# Altium PCB 5Vto24V.PcbDoc
Units mm, origin at the board's own origin, x right, y up, seen from the top; angles counter-clockwise.
Board outline 89.1 x 92.94 mm, 2 copper layers (Top Layer, Bottom Layer), stack 0.74 mm thick; 8 components, 13 nets, 145 pads, 8 vias.
Unrouted connection lines stored in the file: 13.
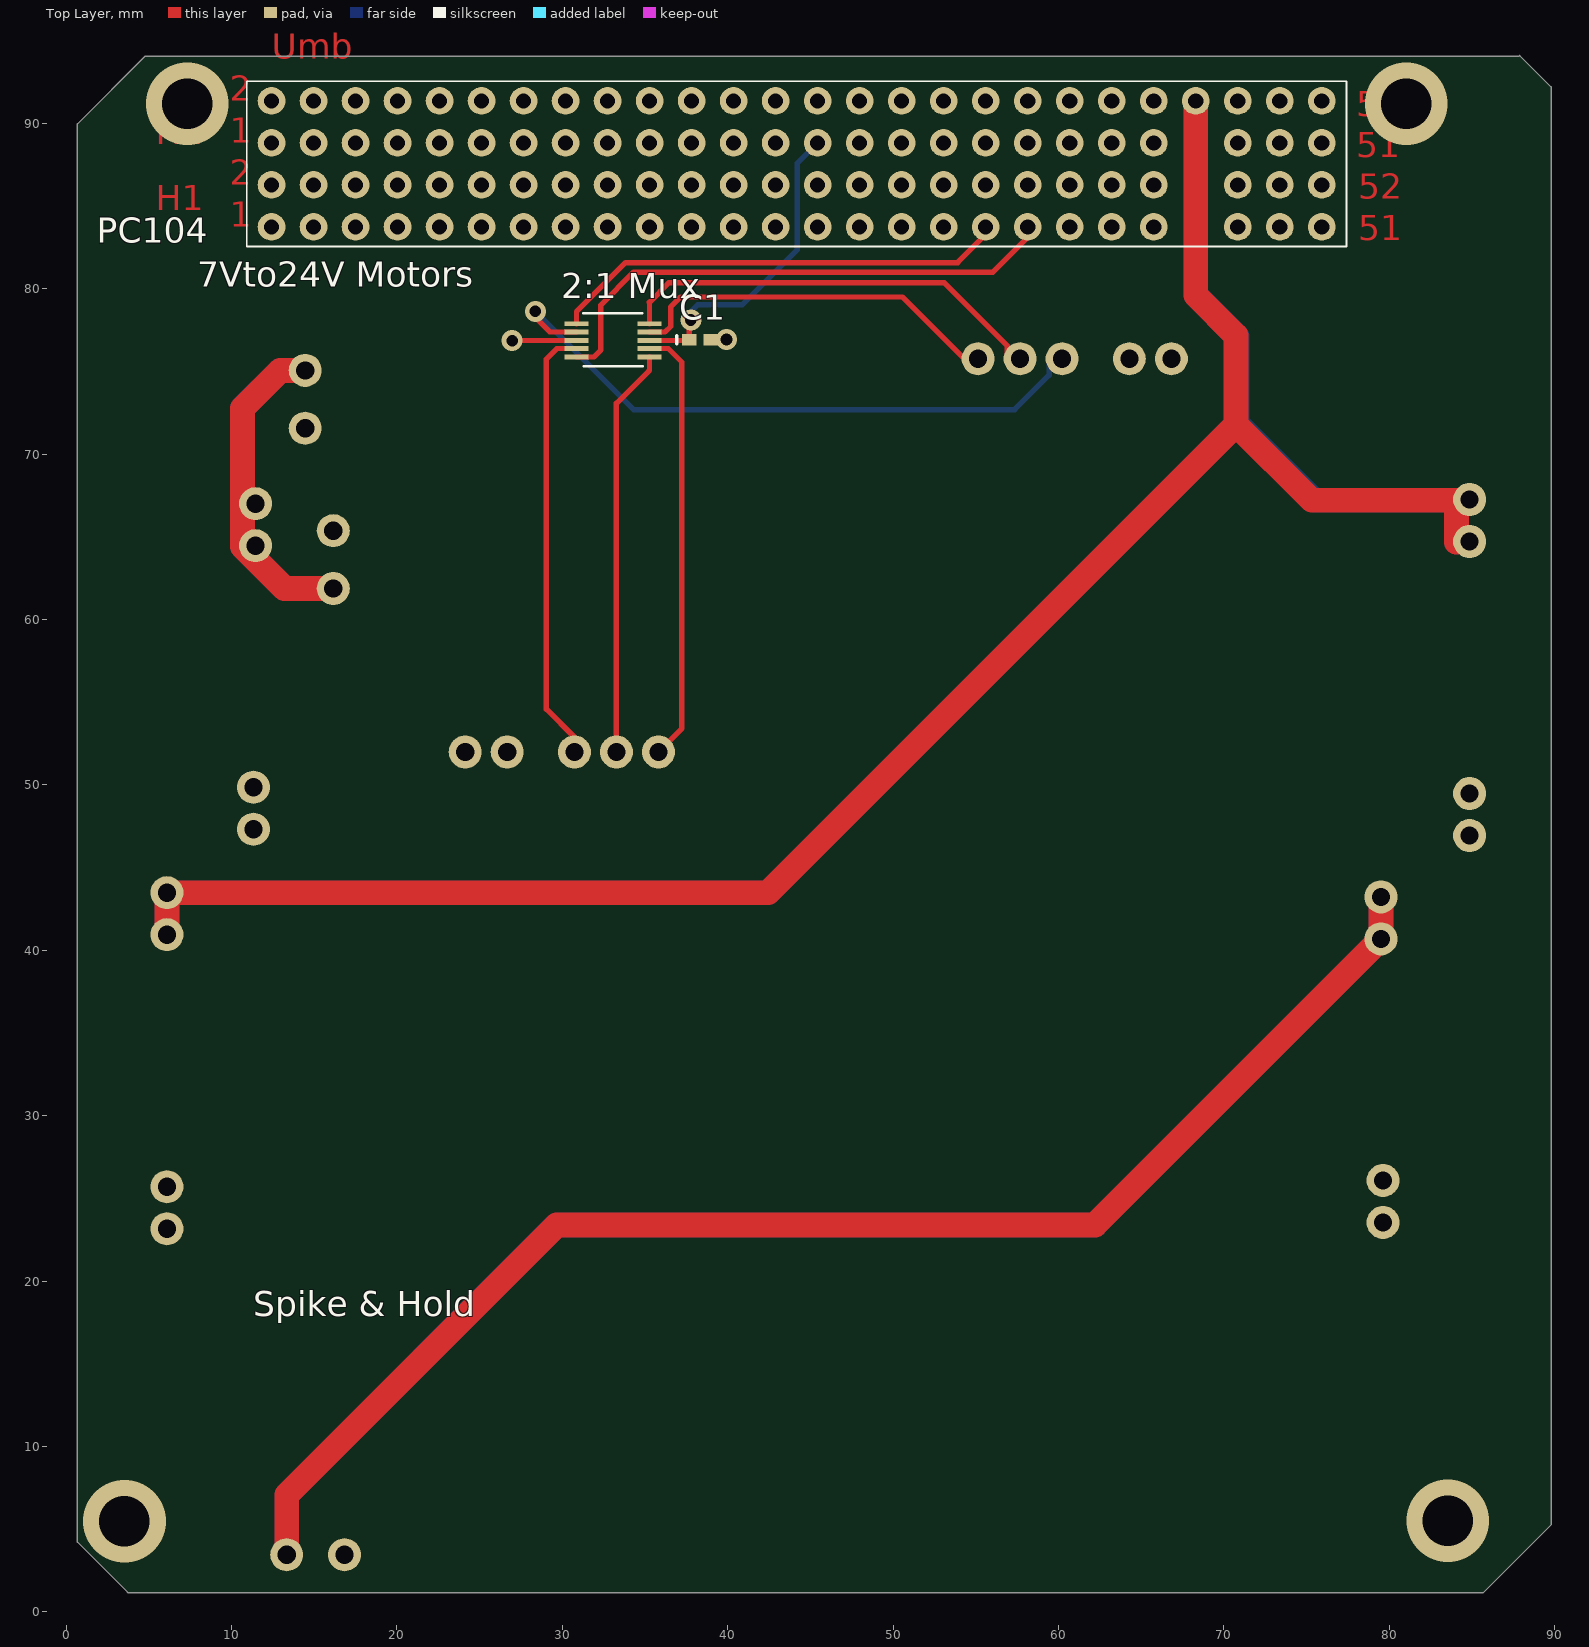
[diagram p0: Top Layer view]
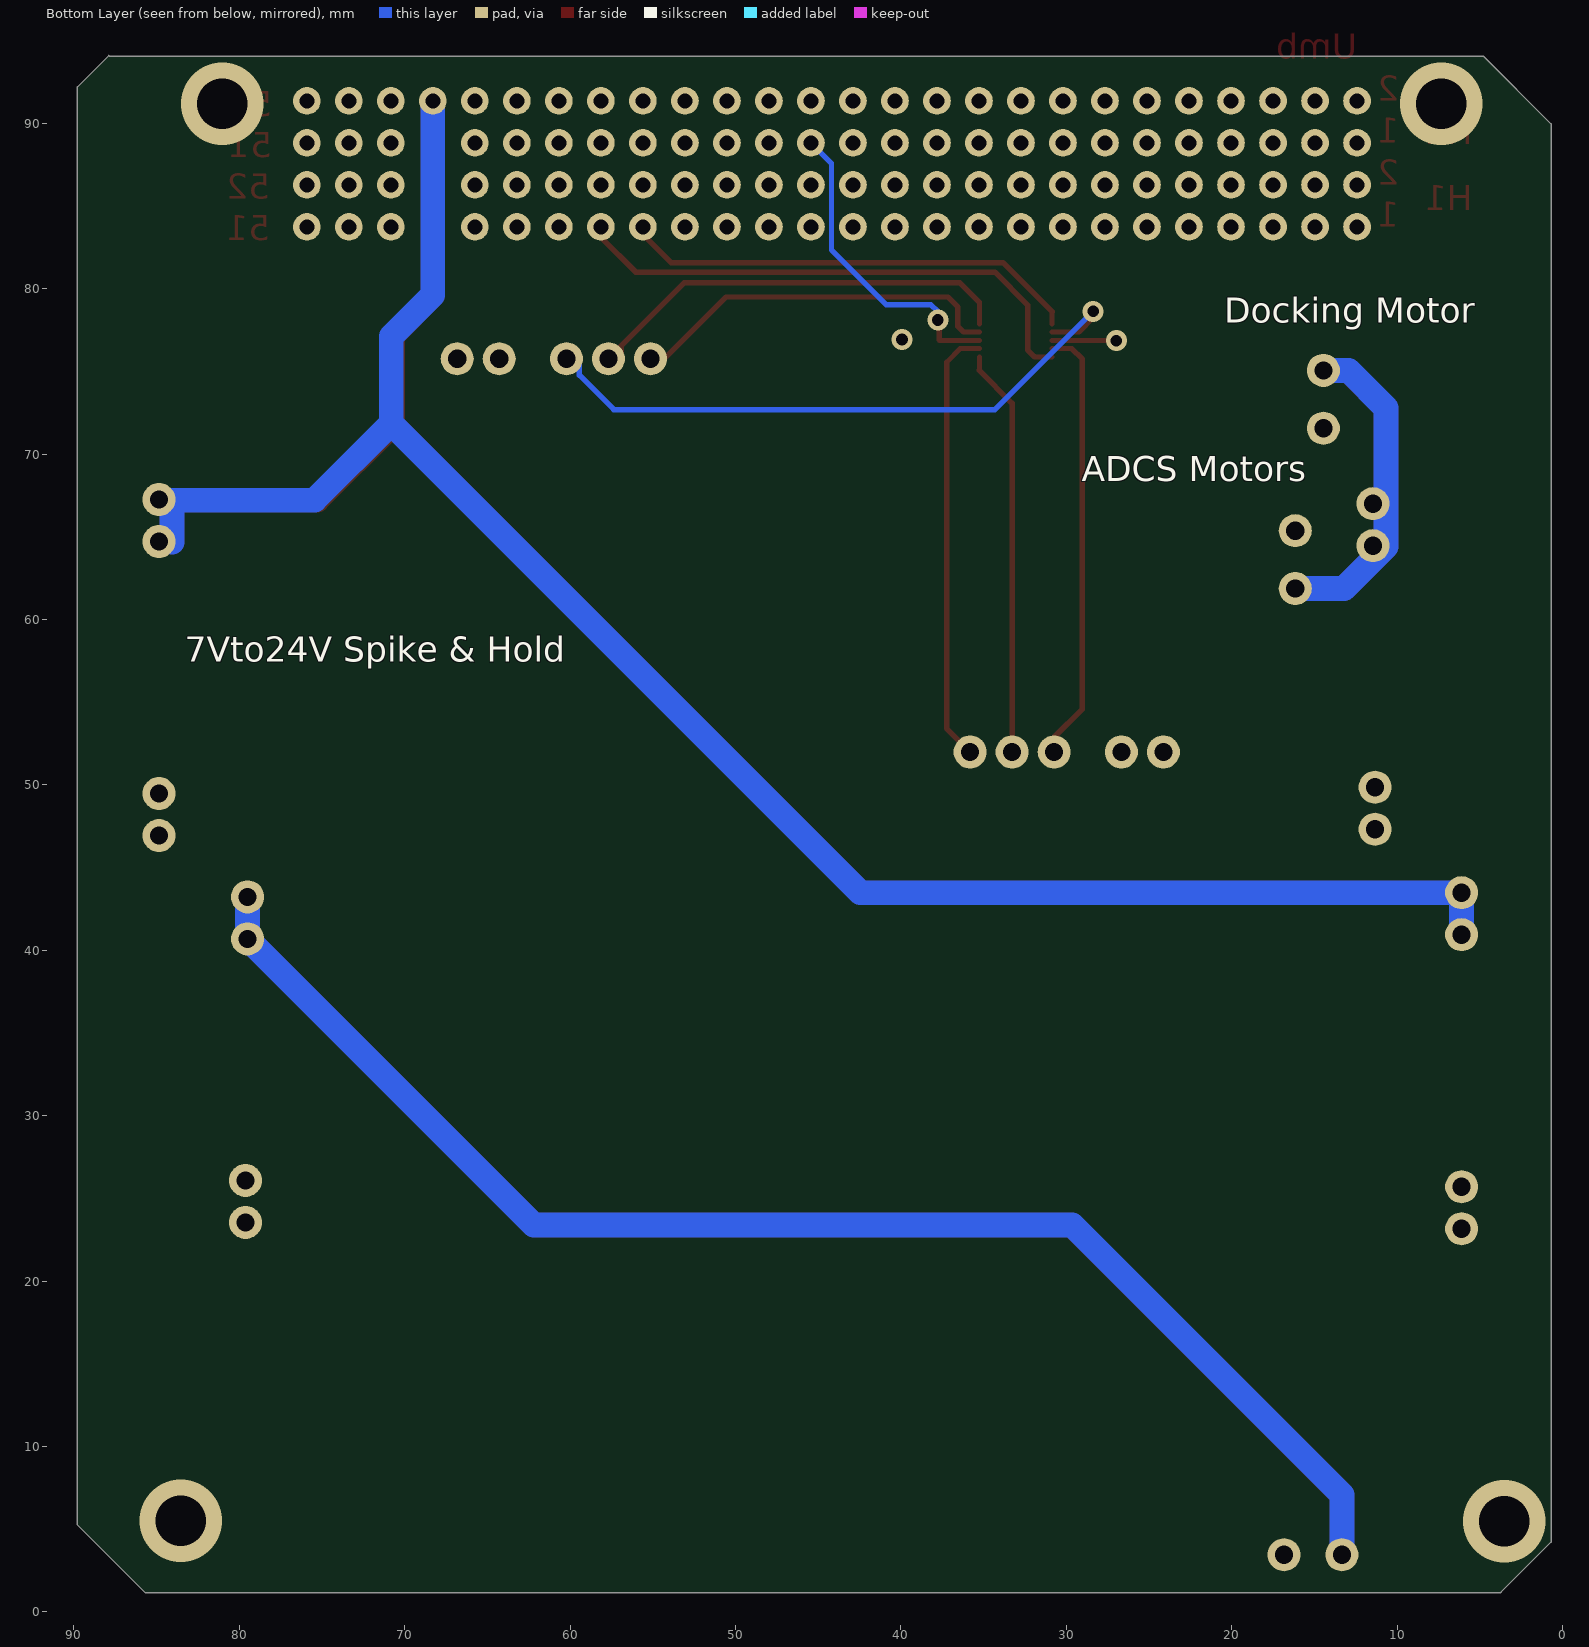
[diagram p1: Bottom Layer view, seen from below]

## Layer stack, top to bottom
Top Solder: solder mask 0.0102, Solder Resist, Dk 3.5
Top Layer: signal copper 0.37
Bottom Layer: signal copper 0.37
Bottom Solder: solder mask 0.0102, Solder Resist, Dk 3.5

## Board outline
4.775,94.056 0.686,89.967 0.686,4.216 3.708,1.194 3.734,1.168 84.506,1.168 85.7,1.168 89.789,5.258 89.789,91.821 89.789,92.202 87.884,94.107 87.833,94.056 4.801,94.056

## Design rules (kind name [scope] priority, off if disabled: settings)
Clearance [All] p1: gap=0.254 ignorepadtopadclearanceinfootprint=FALSE except(0: Arc-Hole Track-Hole SMDPad-Hole THPad-Hole Via-Hole Fill-Hole Poly-Hole Region-Hole Text-Hole; 0.127: Track-Track Track-SMDPad Track-THPad SMDPad-SMDPad SMDPad-THPad THPad-THPad)
HoleSize [All] p1: absolutevalues=TRUE maxlimit=3.048 minlimit=0.025 maxpercent=80.000 minpercent=20.000
MinimumSolderMaskSliver [All] p1: minsoldermaskwidth=0.127
PlaneConnect [All] p1: planeconnectstyle=Direct reliefexpansion=0.508 reliefentries=4 reliefconductorwidth=0.254 reliefairgap=0.254
PolygonConnect [All] p1: connectstyle=Direct reliefconductorwidth=0.254 reliefentries=4 polygonreliefangle="90 Angle" airgapwidth=0.254
RoomDefinition TopV4 [InComponentClass('TopV4')] p1: confinementstyle=ConfineIn formatcopy=TRUE lockcomponents=FALSE outline -100,-100 -49.2,-100 -49.2,-74.6 -100,-74.6
RoutingVias [All] p1: holewidth=0.711 width=1.27 viastyle="Through Hole" minholewidth=0.711 minwidth=1.27 maxholewidth=0.711 maxwidth=1.27
SolderMaskExpansion [All] p1: expansion=0.102
Width [All] p1: maxlimit=0.99 minlimit=0.305 preferedwidth=0.33
27 further rules are at their usual default settings.

## Classes and differential pairs
component class TopV4: "2:1 Mux" 5Vto24V_2 "ADCS Motors" C1 "Docking Motor" PC104 "Spike & Hold"

## Components (designator, comment, footprint, x,y, rotation, side; value= is the part's Value field where it differs from the comment)
"2:1 Mux" "2:1 Multiplexer TS5A23157DGSR" "2:1 Mux" 30.861,77.886 r0 top
"7Vto24V Motors" "7Vto24V" 7Vto24V 11.201,46.939 r0 top
"7Vto24V Spike & Hold" "7Vto24V" 7Vto24V 79.756,23.165 r180 bottom
"ADCS Motors" "HighVoltageHeader" Header 29.314,67.624 r270 bottom
C1 "C0402" 0402 38.329,76.911 r0 top value=0.1uF
"Docking Motor" "HighVoltageHeader" Header 1.295,69.317 r90 bottom
PC104 "PC-104_DCDC Board" "PC-104FOOTPRINT DCDC" 12.421,83.744 r0 top
"Spike & Hold" "HighVoltageHeader" Header 19.085,16.614 r180 top

## Footprints (in the part's own frame and the unit in brackets; to place one, negate y for a bottom-side part, rotate by r counter-clockwise, add the part's x,y. Pads: shape width x height; smd on the part's side, far side on the other; paste and mask are expansions set on the pad)
"2:1 Mux" [mm] "TS5A23157DGSR"
  rect 1.45x0.3 smd mask+0.05: 1(0,0) 2(0,-0.5) 3(0,-1) 4(0,-1.5) 5(0,-2) 6(4.4,-2) 7(4.4,-1.5) 8(4.4,-1) 9(4.4,-0.5) 10(4.4,0)
  silkscreen extent 0.41,-2.57 4.01,0.64
7Vto24V [mm] "7V to 24 V converter"
  round 2 hole 1.1: 1(73.66,0) 1(73.66,2.54) 2(73.66,17.78) 2(73.66,20.32) 3(0.254,17.526) 3(0.254,20.066) 4(0.127,0.381) 4(0.127,2.921) 5(49.022,28.829) 6(46.482,28.829) 7(43.942,28.829) 8(55.626,28.829) 9(53.086,28.829)
  body extent -3.18,-11.81 76.45,31.88, height 0.25
0402 [mm] "Chip Capacitor; Body 1.0 x 0.5 mm (LxW typ)"
  rect 0.9x0.7 smd: 1(-0.65,0) 2(0.65,0)
  silkscreen extent -1.4,-0.25 -1.4,0.25
Header [mm] "High Voltage Connector"
  round 2 hole 1.1: 1(5.75,13.16) 2(2.25,13.16)
  body extent 1.02,0.89 6.86,14.6, height 0.25
"PC-104FOOTPRINT DCDC" [mm]
  round 1.676 hole 0.914 mask+0.076: H1_1(0,0) H1_2(0,2.54) H1_3(2.54,0) H1_4(2.54,2.54) H1_5(5.08,0) H1_6(5.08,2.54) H1_7(7.62,0) H1_8(7.62,2.54) H1_9(10.16,0) H1_10(10.16,2.54) H1_11(12.7,0) H1_12(12.7,2.54) H1_13(15.24,0) H1_14(15.24,2.54) H1_15(17.78,0) H1_16(17.78,2.54) H1_17(20.32,0) H1_18(20.32,2.54) H1_19(22.86,0) H1_20(22.86,2.54) H1_21(25.4,0) H1_22(25.4,2.54) H1_23(27.94,0) H1_24(27.94,2.54) H1_25(30.48,0) H1_26(30.48,2.54) H1_27(33.02,0) H1_28(33.02,2.54) H1_29(35.56,0) H1_30(35.56,2.54) H1_31(38.1,0) H1_32(38.1,2.54) H1_33(40.64,0) H1_34(40.64,2.54) H1_35(43.18,0) H1_36(43.18,2.54) H1_37(45.72,0) H1_38(45.72,2.54) H1_39(48.26,0) H1_40(48.26,2.54) H1_41(50.8,0) H1_42(50.8,2.54) H1_43(53.34,0) H1_44(53.34,2.54) H1_47(58.42,0) H1_48(58.42,2.54) H1_49(60.96,0) H1_50(60.96,2.54) H1_51(63.5,0) H1_52(63.5,2.54) H2_1(0,5.08) H2_2(0,7.62) H2_3(2.54,5.08) H2_4(2.54,7.62) H2_5(5.08,5.08) H2_6(5.08,7.62) H2_7(7.62,5.08) H2_8(7.62,7.62) H2_9(10.16,5.08) H2_10(10.16,7.62) H2_11(12.7,5.08) H2_12(12.7,7.62) H2_13(15.24,5.08) H2_14(15.24,7.62) H2_15(17.78,5.08) H2_16(17.78,7.62) H2_17(20.32,5.08) H2_18(20.32,7.62) H2_19(22.86,5.08) H2_20(22.86,7.62) H2_21(25.4,5.08) H2_22(25.4,7.62) H2_23(27.94,5.08) H2_24(27.94,7.62) H2_25(30.48,5.08) H2_26(30.48,7.62) H2_27(33.02,5.08) H2_28(33.02,7.62) H2_29(35.56,5.08) H2_30(35.56,7.62) H2_31(38.1,5.08) H2_32(38.1,7.62) H2_33(40.64,5.08) H2_34(40.64,7.62) H2_35(43.18,5.08) H2_36(43.18,7.62) H2_37(45.72,5.08) H2_38(45.72,7.62) H2_39(48.26,5.08) H2_40(48.26,7.62) H2_41(50.8,5.08) H2_42(50.8,7.62) H2_43(53.34,5.08) H2_44(53.34,7.62) H2_46(55.88,7.62) H2_47(58.42,5.08) H2_48(58.42,7.62) H2_49(60.96,5.08) H2_50(60.96,7.62) H2_51(63.5,5.08) H2_52(63.5,7.62)
  silkscreen extent -1.5,-1.19 65,8.81

## Part data
C1: "Ceramic Chip Capacitor - Standard", PackageDocument=Mar-2001, Code_IPC="1005 [0402]", Code_JEITA=0402, ComponentLink1Description="Manufacturer Link", ComponentLink1URL=http://www.kemet.com/, ComponentLink2Description=Datasheet, ComponentLink2URL=http://www.kemet.com/kemet/web/homepage/kechome.nsf/vapubfilesname/F3102TA.pdf/$file/F3102TA.pdf, DatasheetDocument=Mar-2001, LatestRevisionDate=19-Mar-2004, LatestRevisionNote="Silkscreen size reduced.", Note="Footprint corresponds to dimensions for bulk cassette packaging. This case size has tightened tolerances.", PackageReference=0402, Published=17-Jul-2002, Publisher="Altium Limited"

## Via types
v1: diameter 1.27, hole 0.711, Top Layer to Bottom Layer, 4 vias
v2: diameter 5, hole 3.048, Top Layer to Bottom Layer, 4 vias

## Nets (pads, with @x,y where several pads share a name; then routed paths per layer and width w, separated by ;. In a path a pad name is that pad's centre, name@x,y a point inside that pad or via, vN(x,y) a via of type N, cw(c..) or ccw(c..) an arc to the next point about the centre after c; other vN are vias at no path point)
24V_1: "7Vto24V Motors.3" "ADCS Motors.1" "Docking Motor.1" | length 39.3
  Top Layer w1.5: 14.455,75.067 12.964,75.067 10.668,72.771 10.668,64.414 13.208,61.874 16.154,61.874
  Bottom Layer w1.5: 14.455,75.067 12.938,75.067 10.668,72.796 10.668,66.954 10.668,64.414 13.208,61.874 16.154,61.874
24V_2: "7Vto24V Spike & Hold.3" "Spike & Hold.1" | length 172.5
  Top Layer w1.5: 13.335,3.454 13.335,7.061 29.667,23.393 62.205,23.393 79.502,40.691 79.502,43.231
  Bottom Layer w1.5: 13.335,3.454 13.335,7.087 29.642,23.393 62.205,23.393 79.502,40.691 79.502,43.231
+3.3V: "2:1 Mux.8" C1.1 PC104.H2_27 | length 19.9
  Top Layer w0.305: 35.261,76.886 C1.1@37.653,76.886
  Top Layer w0.33: C1.1@37.653,76.886 C1.1 37.679,78.501 37.77,78.41 v1(37.77,78.105)
  Bottom Layer w0.33: v1(37.77,78.105) 37.77,78.613 38.202,79.045 40.894,79.045 44.196,82.347 44.196,87.579 PC104.H2_27
"EN MTR": "2:1 Mux.10" "7Vto24V Motors.6" | length 25.8
  Top Layer w0.305: 35.261,77.886 35.261,79.178
  Top Layer w0.33: 35.261,79.178 36.449,80.366 53.086,80.366 56.896,76.556 56.896,75.717
"EN S&H": "2:1 Mux.6" "7Vto24V Spike & Hold.6" | length 24.7
  Top Layer w0.305: 35.261,75.063 35.261,75.886
  Top Layer w0.33: 33.274,51.994 33.274,73.076 35.261,75.063
GOM_GND_1: "2:1 Mux.3" "7Vto24V Motors.1" "7Vto24V Motors.4" "7Vto24V Spike & Hold.1" "7Vto24V Spike & Hold.4" "ADCS Motors.2" "Docking Motor.2" "Spike & Hold.2" C1.2 PC104.H2_29 | length 3.9
  Top Layer w0.305: v1@27,76.886 30.861,76.886
  Top Layer w0.33: v1(26.975,76.86) v1@27,76.886
  other v1: 39.929,76.937
"Motor Enable": "2:1 Mux.1" PC104.H1_35 | length 27.9
  Top Layer w0.305: 30.861,77.886 30.861,78.613
  Top Layer w0.33: 30.861,78.613 33.833,81.585 53.899,81.585 55.601,83.287 PC104.H1_35
"OFF MTR": "2:1 Mux.9" "7Vto24V Motors.7" | length 22.2
  Top Layer w0.305: 35.261,77.386 36.212,77.386 36.551,77.724
  Top Layer w0.33: 36.551,77.724 36.551,78.892 37.16,79.502 50.571,79.502 54.356,75.717
"OFF S&H": "2:1 Mux.7" "7Vto24V Spike & Hold.7" | length 26.5
  Top Layer w0.305: 35.261,76.386 36.416,76.386 37.236,75.565
  Top Layer w0.33: 35.814,51.994 37.236,53.416 37.236,75.565
"ON MTR": "2:1 Mux.2" "7Vto24V Motors.5" | length 38.6
  Top Layer w0.305: 29.243,77.386 30.861,77.386
  Top Layer w0.33: v1(28.372,78.638) 28.372,78.257 29.243,77.386
  Bottom Layer w0.33: v1(28.372,78.638) 34.315,72.695 57.353,72.695 59.436,74.778 59.436,75.717
"ON S&H": "2:1 Mux.4" "7Vto24V Spike & Hold.5" | length 26.5
  Top Layer w0.305: 29.675,76.386 30.861,76.386
  Top Layer w0.33: 29.675,76.386 29.032,75.743 29.032,54.585 30.734,52.883 30.734,51.994
"Spike & Hold Enable": "2:1 Mux.5" PC104.H1_37 | length 32.5
  Top Layer w0.305: 30.861,75.886 31.918,75.886
  Top Layer w0.33: 31.918,75.886 32.334,76.302 32.334,79.019 34.315,81.001 56.032,81.001 58.141,83.109 PC104.H1_37
V_BAT_1: "7Vto24V Motors.2" "7Vto24V Spike & Hold.2" PC104.H2_46 | length 234.5
  Top Layer w1.5: 6.096,40.945 6.096,43.485 42.443,43.485 70.739,71.78 ; PC104.H2_46 68.301,79.603 70.739,77.165 70.739,71.78 ; 84.074,64.668 84.074,67.208 75.311,67.208 70.739,71.78
  Bottom Layer w1.5: 6.096,40.945 6.096,43.485 42.443,43.485 70.815,71.857 ; PC104.H2_46 68.301,79.629 70.815,77.114 70.815,71.857 ; 84.074,64.668 84.074,67.208 75.463,67.208 70.815,71.857
pads on no net: "7Vto24V Motors.8" "7Vto24V Motors.9" "7Vto24V Spike & Hold.8" "7Vto24V Spike & Hold.9" PC104.H1_1 PC104.H1_2 PC104.H1_3 PC104.H1_4 PC104.H1_5 PC104.H1_6 PC104.H1_7 PC104.H1_8 PC104.H1_9 PC104.H1_10 PC104.H1_11 PC104.H1_12 PC104.H1_13 PC104.H1_14 PC104.H1_15 PC104.H1_16 PC104.H1_17 PC104.H1_18 PC104.H1_19 PC104.H1_20 PC104.H1_21 PC104.H1_22 PC104.H1_23 PC104.H1_24 PC104.H1_25 PC104.H1_26 PC104.H1_27 PC104.H1_28 PC104.H1_29 PC104.H1_30 PC104.H1_31 PC104.H1_32 PC104.H1_33 PC104.H1_34 PC104.H1_36 PC104.H1_38 PC104.H1_39 PC104.H1_40 PC104.H1_41 PC104.H1_42 PC104.H1_43 PC104.H1_44 PC104.H1_47 PC104.H1_48 PC104.H1_49 PC104.H1_50 PC104.H1_51 PC104.H1_52 PC104.H2_1 PC104.H2_2 PC104.H2_3 PC104.H2_4 PC104.H2_5 PC104.H2_6 PC104.H2_7 PC104.H2_8 PC104.H2_9 PC104.H2_10 PC104.H2_11 PC104.H2_12 PC104.H2_13 PC104.H2_14 PC104.H2_15 PC104.H2_16 PC104.H2_17 PC104.H2_18 PC104.H2_19 PC104.H2_20 PC104.H2_21 PC104.H2_22 PC104.H2_23 PC104.H2_24 PC104.H2_25 PC104.H2_26 PC104.H2_28 PC104.H2_30 PC104.H2_31 PC104.H2_32 PC104.H2_33 PC104.H2_34 PC104.H2_35 PC104.H2_36 PC104.H2_37 PC104.H2_38 PC104.H2_39 PC104.H2_40 PC104.H2_41 PC104.H2_42 PC104.H2_43 PC104.H2_44 PC104.H2_47 PC104.H2_48 PC104.H2_49 PC104.H2_50 PC104.H2_51 PC104.H2_52
copper on no net:
  other v2: 3.526,5.479 83.546,5.504 7.326,91.179 81.026,91.179

## Silkscreen, mask and mechanical layers (free items; w line width, h text height)
Mechanical 2:
  lines w0.762: 0.305,4.216 ccw(c0.686,4.216) 0.417,3.947 ; 0.305,4.216 ccw(c0.686,4.216) 0.416,3.947 ; 0.305,4.216 0.305,89.967 ; 0.305,89.967 cw(c0.686,89.967) 0.416,90.236 0.417,90.237 ; 0.305,89.967 cw(c0.686,89.967) 0.417,90.237 ; 0.417,3.947 3.439,0.925 ; 0.416,3.947 0.417,3.947 ; 0.417,90.237 4.505,94.325 ; 3.439,0.925 ccw(c3.708,1.194) 3.439,0.924 ; 3.439,0.924 ccw(c3.708,1.194) 3.439,0.924 ; 3.439,0.924 3.464,0.899 ; 3.439,0.924 3.439,0.924 ; 3.439,0.925 3.439,0.924 ; 3.464,0.899 ccw(c3.734,1.168) 3.734,0.787 ; 3.464,0.899 ccw(c3.734,1.168) 3.734,0.787 ; 3.464,0.899 3.464,0.899 ; 3.734,0.787 84.506,0.787 85.7,0.787 ; 4.505,94.325 cw(c4.775,94.056) 4.775,94.437 ; 4.506,94.326 cw(c4.775,94.056) 4.775,94.437 ; 4.505,94.325 4.506,94.326 ; 4.775,94.437 4.801,94.437 87.694,94.437 ; 85.7,0.787 ccw(c85.7,1.168) 85.969,0.899 ; 85.7,0.787 ccw(c85.7,1.168) 85.969,0.899 85.969,0.899 ; 85.969,0.899 90.058,4.988 ; 87.694,94.437 cw(c87.884,94.107) 88.153,94.376 88.154,94.376 ; 87.694,94.437 cw(c87.884,94.107) 88.154,94.376 ; 88.154,94.376 90.058,92.472 ; 90.058,4.988 ccw(c89.789,5.258) 90.17,5.258 ; 90.058,4.988 ccw(c89.789,5.258) 90.17,5.258 ; 90.058,4.988 90.058,4.988 ; 90.058,92.472 cw(c89.789,92.202) 90.17,92.202 ; 90.058,92.472 90.058,92.471 cw(c89.789,92.202) 90.17,92.202 ; 90.17,5.258 90.17,91.821 90.17,92.202
Drill Drawing:
  text ".Legend" at 69.215,5.944 h1.52

## Text inside footprints (layer, text, board x,y; h text height)
PC104: Top Layer "52" at 78.021,90.444 h1.52; Top Layer "51" at 78.021,87.944 h1.52; Top Layer "52" at 78.121,85.444 h1.52; Top Layer "51" at 78.121,82.944 h1.52; Top Layer "2" at 9.881,91.364 h1.52; Top Layer "1" at 9.881,88.824 h1.52; Top Layer "2" at 9.881,86.284 h1.52; Top Layer "1" at 9.881,83.744 h1.52; Top Layer "H2" at 5.421,88.744 h1.52; Top Layer "H1" at 5.421,84.744 h1.52; Top Layer "Umb" at 12.421,93.904 h1.52; Mechanical 1 "J1" at 51.828,87.638 h0.76